# Altium PCB LM25148.PcbDoc
Units mm, origin at the board's own origin, x right, y up, seen from the top; angles counter-clockwise.
Board outline 94.97 x 34.94 mm, 4 copper layers (Top Layer, Layer 1, Layer 2, Bottom Layer), stack 0.568 mm thick; 79 components, 28 nets, 268 pads, 441 vias.
Unrouted connection lines stored in the file: 7.
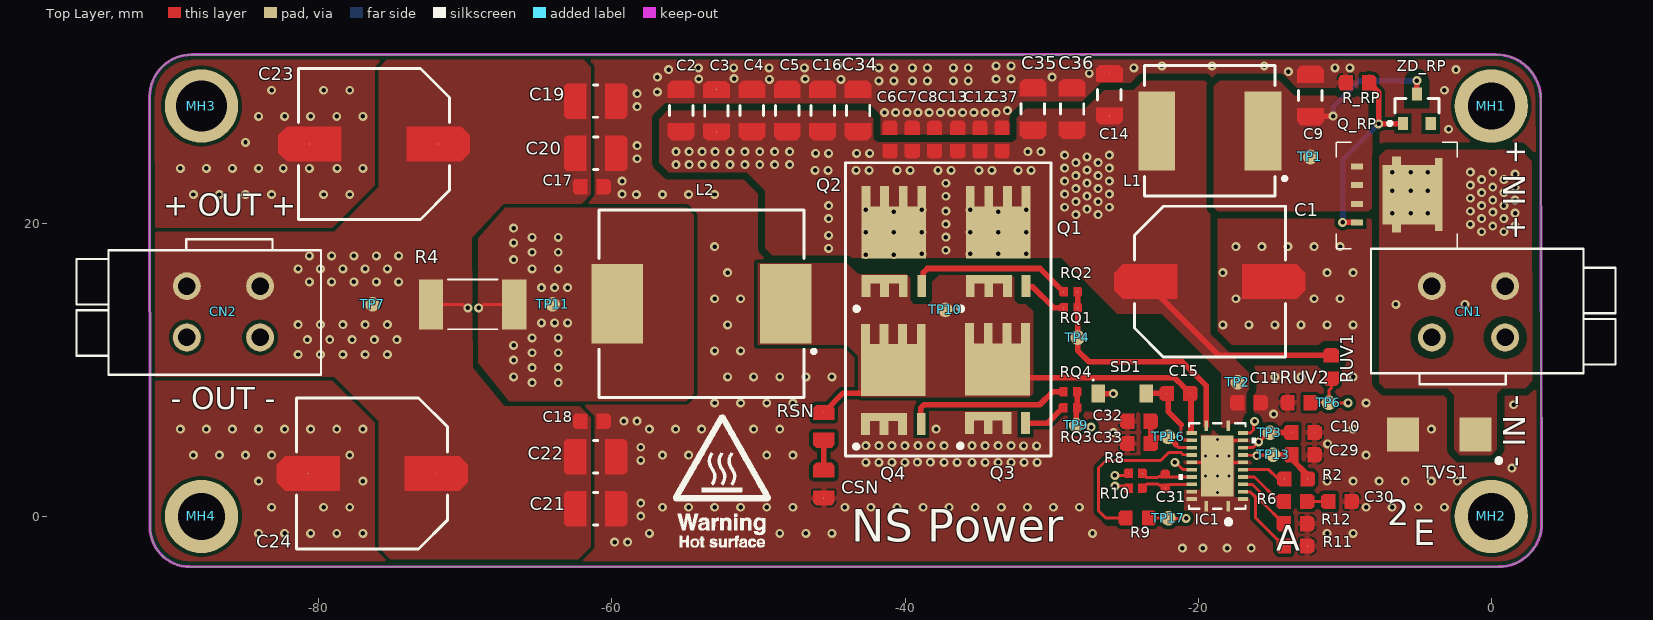
[diagram p0: Top Layer view]
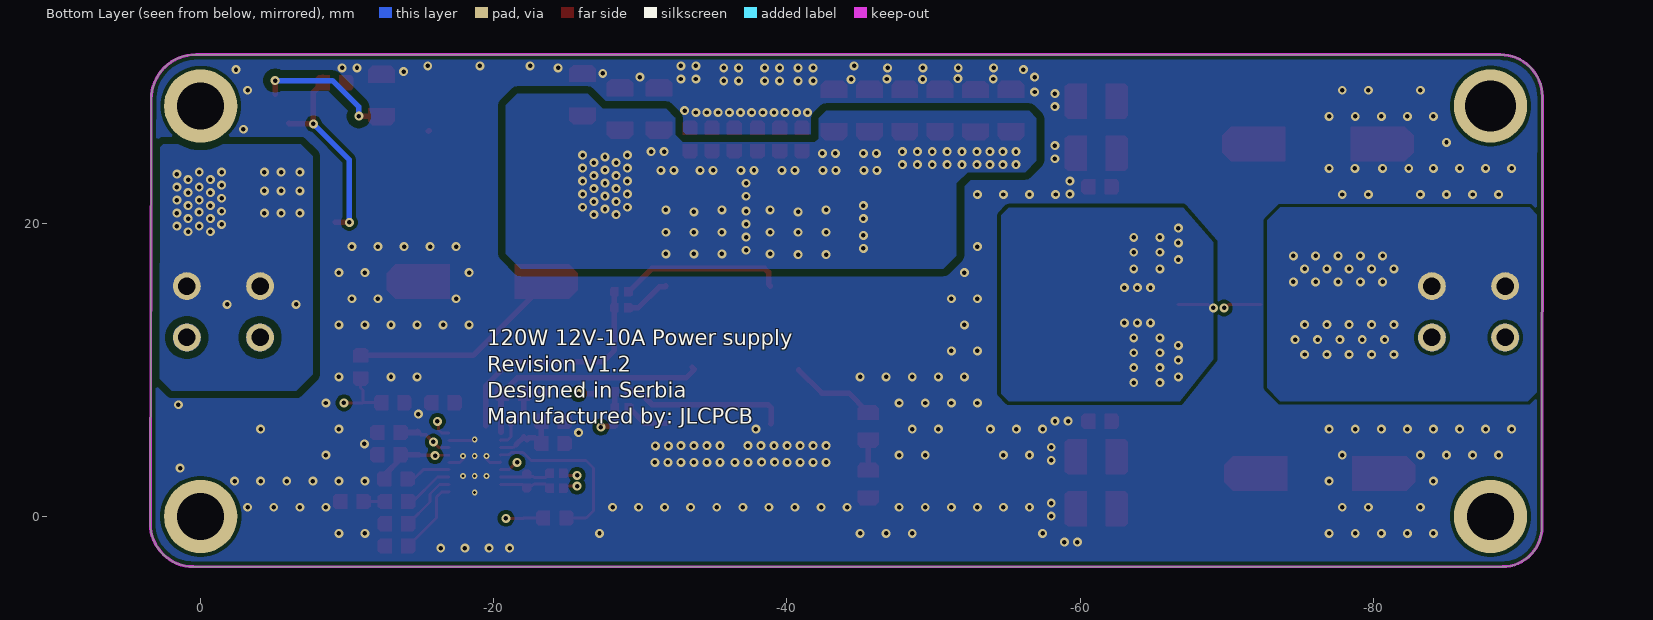
[diagram p1: Bottom Layer view, seen from below]
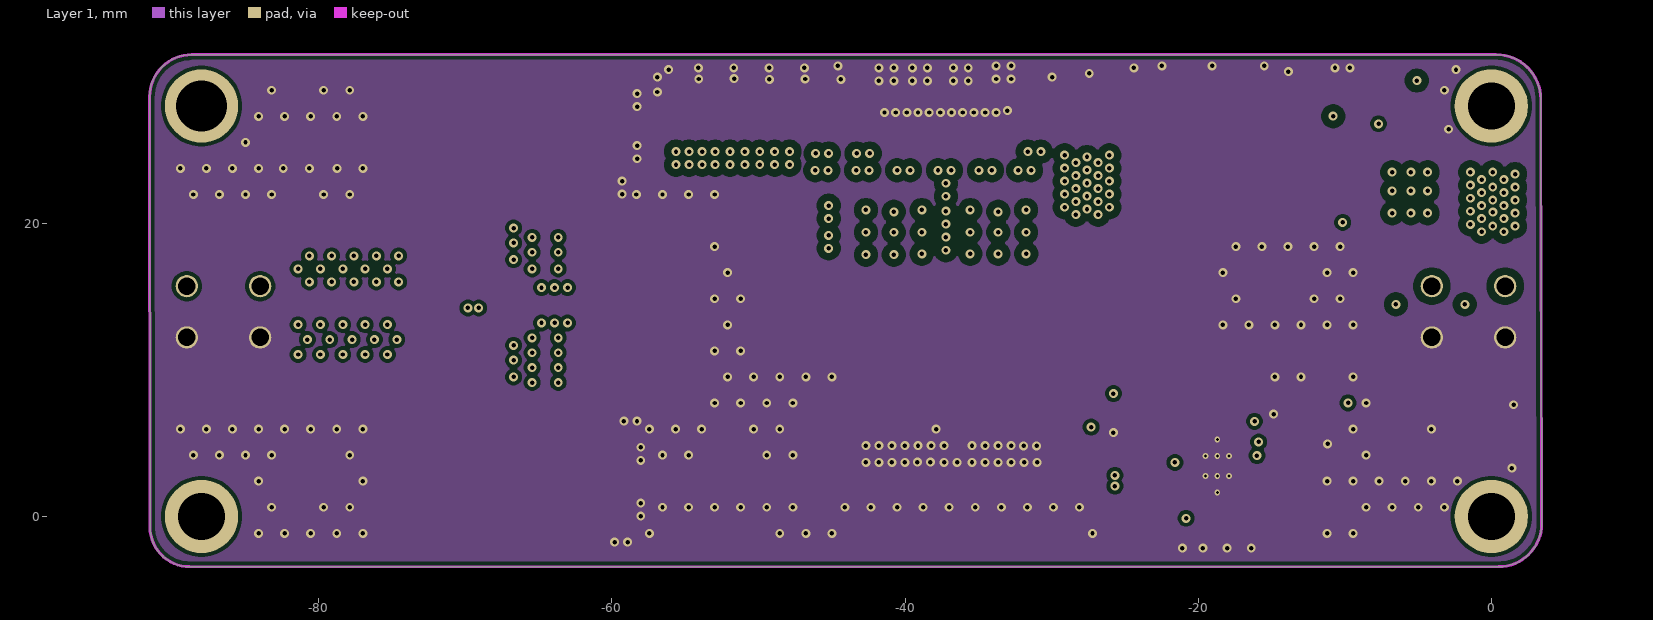
[diagram p2: Layer 1]
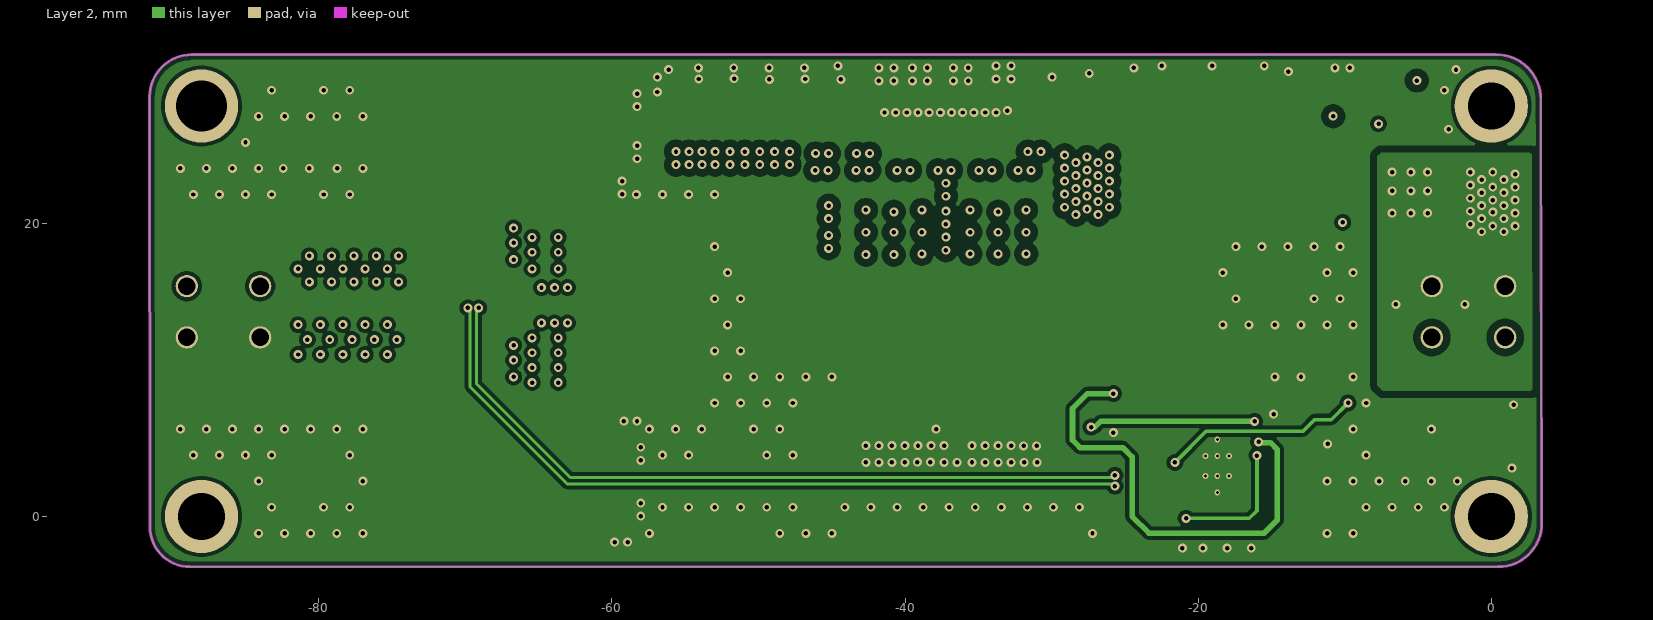
[diagram p3: Layer 2]
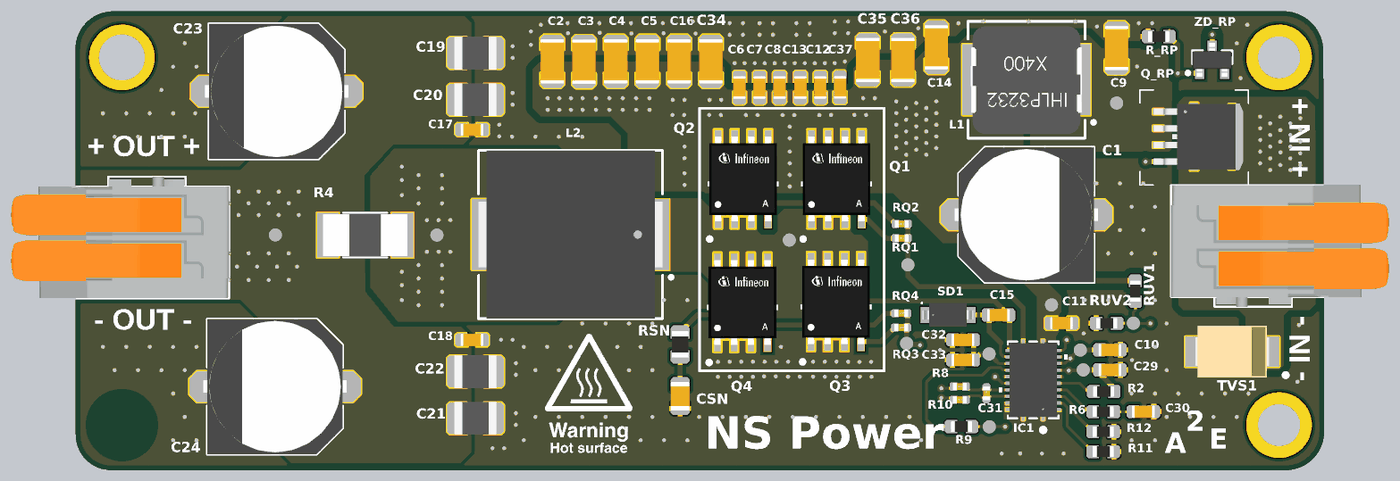
[diagram p4: 3D render of the assembled board from above, using the file's embedded part models]

## Layer stack, top to bottom
Top Solder: solder mask 0.0102, Solder Resist, Dk 3.5
Top Layer: signal copper 0.0356
Dielectric 2: prepreg 0.0711, PP-006, Dk 4.1
Layer 1: signal copper 0.0175
Dielectric 1: dielectric 0.32, FR-4, Dk 4.8
Layer 2: signal copper 0.0175
Dielectric 3: prepreg 0.0711, PP-006, Dk 4.1
Bottom Layer: signal copper 0.0356
Bottom Solder: solder mask 0.0102, Solder Resist, Dk 3.5

## Board outline
-88.806,-3.431 cw(c-88.806,-0.725) -91.512,-0.725 -91.535,28.643 cw(c-88.672,28.643) -88.672,31.506 -88.672,31.507 0.322,31.513 cw(c0.322,28.465) 3.37,28.465 3.431,-0.5 cw(c0.5,-0.5) 0.5,-3.431

## Design rules (kind name [scope] priority, off if disabled: settings)
Clearance "Schematic Clearance Constraint_2" [InNet('NetC9_2')] p1: gap=0.508 ignorepadtopadclearanceinfootprint=FALSE
Clearance "Schematic Clearance Constraint_1" [InNet('VIN')] p2: gap=0.508 ignorepadtopadclearanceinfootprint=FALSE except(0.254: SMDPad-SMDPad)
Clearance "Schematic Clearance Constraint" [InNet('NetCN1_3')] p3: gap=0.508 ignorepadtopadclearanceinfootprint=FALSE
Clearance [All] p4: gap=0.254 ignorepadtopadclearanceinfootprint=FALSE except(0: Arc-Hole Track-Hole SMDPad-Hole THPad-Hole Via-Hole Fill-Hole Poly-Hole Region-Hole Text-Hole; 0.127: Arc-Arc Arc-Track Arc-Via Track-Track Track-Via SMDPad-SMDPad SMDPad-Via Via-Via)
DiffPairsRouting [All] p1: maxlimit=0.254 minlimit=0.254 mostfreqgap=0.254 toplayer_minwidth=0.152 toplayer_maxwidth=0.381 toplayer_prefwidth=0.203 midlayer1_minwidth=0.152 midlayer1_maxwidth=0.381 midlayer1_prefwidth=0.203 midlayer2_minwidth=0.152 midlayer2_maxwidth=0.381 midlayer2_prefwidth=0.203 bottomlayer_minwidth=0.152 bottomlayer_maxwidth=0.381 bottomlayer_prefwidth=0.203 maxuncoupledlength=12.7
HoleSize [All] p1: absolutevalues=TRUE maxlimit=3.81 minlimit=0.025 maxpercent=80.000 minpercent=20.000
MinimumSolderMaskSliver [All] p1: minsoldermaskwidth=0.025
PolygonConnect PolygonConnect_5 [InComponentClass('relief_connect')] p1: connectstyle=Relief reliefconductorwidth=0.381 reliefentries=4 polygonreliefangle="90 Angle" airgapwidth=0.127
PolygonConnect PolygonConnect_4 [InNet('NetCN1_3') vs InNet('NetCN1_3')] p2: connectstyle=Direct reliefconductorwidth=0.254 reliefentries=4 polygonreliefangle="90 Angle" airgapwidth=0.254
PolygonConnect PolygonConnect_1 [All vs IsNamedPolygon('NONET_L01_P000')] p3: thpad.connectstyle=Direct thpad.reliefconductorwidth=0.254 thpad.reliefentries=4 thpad.polygonreliefangle="90 Angle" thpad.airgapwidth=0.254 smdpad.connectstyle=Direct smdpad.reliefconductorwidth=0.254 smdpad.reliefentries=4 smdpad.polygonreliefangle="90 Angle" smdpad.airgapwidth=0.254 via.connectstyle=Relief via.reliefconductorwidth=0.254 via.reliefentries=4 via.polygonreliefangle="90 Angle" via.airgapwidth=0.254
PolygonConnect PolygonConnect_3 [InComponentClass('Dirrect') vs InNetClass('Direct_connect')] p4: connectstyle=Direct reliefconductorwidth=0.254 reliefentries=4 polygonreliefangle="90 Angle" airgapwidth=0.254
PolygonConnect PolygonConnect_2 [InNet('GND')] p5: connectstyle=Direct reliefconductorwidth=0.254 reliefentries=4 polygonreliefangle="90 Angle" airgapwidth=0.254
PolygonConnect [InNetClass('Direct_connect')] p6: connectstyle=Direct reliefconductorwidth=0.254 reliefentries=4 polygonreliefangle="90 Angle" airgapwidth=0.254
RoutingVias [All] p1: holewidth=0.305 width=0.61 viastyle="Through Hole" minholewidth=0.2 minwidth=0.4 maxholewidth=0.305 maxwidth=0.61
SilkToSolderMaskClearance [IsPad] p1: minsilkscreentomaskgap=0.025 clearancetoexposedcopper=TRUE
SolderMaskExpansion [All] p1: expansion=0.102 istentingtop=FALSE
Width [All] p1: maxlimit=0.635 minlimit=0.203 preferedwidth=0.254 toplayer_maxwidth=0.381 midlayer1_minwidth=0.254 midlayer1_maxwidth=0.381 midlayer2_minwidth=0.254 midlayer2_maxwidth=0.381 minimp=50.000000 maximp=50.000000 favimp=50.000000
26 further rules are at their usual default settings.

## Classes and differential pairs
component class relief_connect: C10 C29 C30 C32 C33 CSN R11 R12 R_RP RUV2
component class Dirrect: MH1 MH2 MH4
net class Direct_connect: NetC9_2 R_SENSE_N R_SENSE_P SW_NODE VIN
differential pair R_SENSE: +R_SENSE_P -R_SENSE_N

## Components (designator, comment, footprint, x,y, rotation, side; value= is the part's Value field where it differs from the comment)
C1 "330uF" CAPAE109103X103M -19.205,16.015 r0 top
C2 "10uF" CAP_1206 -55.273,27.699 r270 top
C3 "10uF" CAP_1206 -52.865,27.678 r90 top
C4 "10uF" CAP_1206 -50.447,27.699 r90 top
C5 "10uF" CAP_1206 -48.034,27.699 r90 top
C6 "0.1uF" CAP_0603 -41.029,25.709 r90 top
C7 "0.1uF" CAP_0603 -39.505,25.709 r90 top
C8 "0.1uF" CAP_0603 -37.981,25.709 r270 top
C9 "10uF" CAP_1206 -12.347,28.715 r270 top
C10 "2.2uF" CAP_0603 -12.855,5.728 r180 top
C11 "0.1uF" CAP_0603 -16.538,7.76 r180 top
C12 "0.1uF" CAP_0603 -34.882,25.709 r270 top
C13 "0.1uF" CAP_0603 -36.406,25.709 r90 top
C14 "10uF" CAP_1206 -26.063,28.768 r270 top
C15 "0.1uF" CAP_0603 -21.336,8.382 r180 top
C16 "10uF" CAP_1206 -45.621,27.699 r90 top
C17 "100nf" CAP_0603 -61.366,22.492 r180 top
C18 "100nf" CAP_0603 -61.369,6.49 r180 top
C19 "22uF" CAP_1210 -61.115,28.334 r0 top
C20 "22uF" CAP_1210 -61.112,24.778 r0 top
C21 "22uF" CAP_1210 -61.115,0.521 r180 top
C22 "22uF" CAP_1210 -61.115,4.077 r0 top
C23 "220uF" CAPAE109103X103M -76.228,25.413 r180 top
C24 "220uF" CAPAE109103X103M -76.355,2.934 r180 top
C29 "100nf" CAP_0603 -12.855,4.204 r180 top
C30 "1.8nF" CAP_0603 -10.315,1.029 r180 top
C31 "6pF" CAP_0402 -22.253,2.426 r90 top
C32 "100nf" CAP_0603 -24.031,6.49 r0 top
C33 "2.2uF" CAP_0603 -24.031,4.966 r180 top
C34 "10uF" CAP_1206 -43.208,27.699 r90 top
C35 "10uF" CAP_1206 -31.275,27.805 r90 top
C36 "10uF" CAP_1206 -28.608,27.805 r90 top
C37 "0.1uF" CAP_0603 -33.384,25.722 r270 top
CN1 "TERM BLK PCB LEVER 3.5MM 2POS" CONN2_2601-1102_WAG -1.557,13.962 r90 top locked
CN2 "TERM BLK PCB LEVER 3.5MM 2POS" CONN2_2601-1102_WAG -86.5,13.962 r270 top locked
CSN "1nF" CAP_0805 -45.542,2.21 r90 top
IC1 "LM25148RGYR 42-V SYNCHRONOUS BUCK DC/DC CONT" VQFN25_RGY_TEX -18.697,3.442 r180 top
L1 "2.2uH" IHLP-3232DZ-51 -19.205,26.302 r180 top
L2 "10uH" INDP135126X65N -53.881,14.508 r180 top locked
MH1 "Mounting Hole" HOLE-3mm#1 0.322,28.465 r0 top
MH2 "Mounting Hole" HOLE-3mm#2 -0.008,-0.754 r0 top
MH3 "Mounting Hole" HOLE-3mm#3 -92.561,27.893 r0 top
MH4 "Mounting Hole" HOLE-3mm#4 -106.822,-0.598 r0 top
Q1 "IAUCN04S7L028ATMA1" PG-TDSON-8-33 -33.649,18.739 r0 top locked
Q2 "IAUCN04S7L028ATMA1" PG-TDSON-8-33 -40.761,18.739 r0 top locked
Q3 "IAUCN04S7L028ATMA1" PG-TDSON-8-33 -33.688,9.39 r0 top locked
Q4 "IAUCN04S7L028ATMA1" PG-TDSON-8-33 -40.8,9.343 r0 top locked
Q_RP "SQJ659EP PMOS" "PowerPAK SO-8L SINGLE" -6.383,21.963 r270 top
R2 "49.9kOhm" RES_0603 -13.325,2.553 r180 top
R4 "5mOhm" SENSE_RES_2512 -69.502,14.47 r180 top
R6 "24.9kOhm" RES_0603 -13.363,1.029 r180 top
R8 "0 Ohm Jump" RES_0402 -24.285,2.934 r180 top locked
R9 "100Kohm" RES_0603 -24.158,-0.114 r0 top
R10 "0 Ohm Jump" RES_0402 -24.285,1.918 r180 top
R11 "41.2kOhm" RES_0603 -13.363,-2.019 r180 top
R12 "49.3kOhm" RES_0603 -13.363,-0.495 r180 top
R_RP "47kOhm" RES_0603 -9.144,29.591 r0 top
RQ1 "0 Ohm Jump" RES_0402 -28.702,14.224 r180 top
RQ2 "0 Ohm Jump" RES_0402 -28.702,15.316 r180 top
RQ3 "0 Ohm Jump" RES_0402 -28.734,7.424 r180 top
RQ4 "0 Ohm Jump" RES_0402 -28.731,8.516 r180 top
RSN "3 Ohm" RES_0805 -45.542,6.147 r90 top
RUV1 "200kOhm" RES_0603 -10.922,10.198 r90 top
RUV2 "14.3kOhm" RES_0603 -13.109,7.76 r0 top
SD1 "BAT54T1G Schottky" SODFL371X135-2N -25.174,8.395 r0 top
TP1 "Test point" TestPoint -12.347,24.524 r0 top
TP2 "Test point" TestPoint -17.3,9.157 r90 top
TP3 "Test point" TestPoint -15.113,5.715 r0 top
TP4 "Test point" TestPoint -28.222,12.205 r90 top
TP6 "Test point" TestPoint -11.077,7.76 r90 top
TP7 "Test point" TestPoint -76.327,14.478 r90 top
TP9 "Test point" TestPoint -28.321,6.223 r90 top
TP10 "Test point" TestPoint -37.244,14.089 r90 top
TP11 "Test point" TestPoint -64.041,14.47 r90 top
TP13 "Test point" TestPoint -14.887,4.204 r0 top
TP16 "Test point" TestPoint -22.05,5.423 r0 top
TP17 "Test point" TestPoint -22.033,-0.122 r90 top
TVS1 "TPSMB33CA" DO-214AA -3.556,5.588 r180 top
ZD_RP "DZ23C15-E3-08 Zener Diode" SOT95P245X96-3N -5.08,27.813 r90 top

## Footprints (in the part's own frame and the unit in brackets; to place one, negate y for a bottom-side part, rotate by r counter-clockwise, add the part's x,y. Pads: shape width x height; smd on the part's side, far side on the other; paste and mask are expansions set on the pad)
CAP_0402 [mil] "Chip Capacitor, 2-Leads, Body 0.40x0.20mm, IPC Medium Density"
  round 1 smd mask+1.97: 1(-18.9,0) 2(18.9,0)
  Top Layer region: 7.68,-12.2 24.51,-12.2 30.12,-6.59 30.12,6.59 24.51,12.2 7.68,12.2
  Top Layer region: -24.51,-12.2 -30.12,-6.59 -30.12,6.59 -24.51,12.2 -7.68,12.2 -7.68,-12.2
  body extent -21,-11 20,11, height 22
CAP_0603 [mil] "Chip Capacitor, 2-Leads, Body 1.60x0.80mm, IPC Medium Density"
  round 1 smd: 1(-31.5,0) 2(31.5,0)
  Top Layer region: -50.2,-13.8 -50.2,13.8 -44.31,19.69 -12.8,19.69 -12.8,-19.69 -44.31,-19.69
  Top Layer region: 12.8,-19.69 12.8,19.69 44.31,19.69 50.2,13.8 50.2,-13.8 44.31,-19.69
  body extent -34,-19 34,19, height 31
CAP_0805 [mil] "Chip Capacitor, 2-Leads, Body 2.00x1.25mm, IPC Medium Density"
  round 1 smd: 1(-37.4,0) 2(37.4,0)
  Top Layer region: 17.72,-28.54 17.72,28.54 49.46,28.54 57.09,20.91 57.09,-20.91 49.46,-28.54
  Top Layer region: -57.09,-20.91 -57.09,20.91 -49.46,28.54 -17.72,28.54 -17.72,-28.54 -49.46,-28.54
  body extent -43,-29 43,29, height 24
CAP_1206 [mil] "Chip Capacitor, 2-Leads, Body 3.20x1.60mm, IPC Medium Density"
  round 1 smd: 1(-57.09,0) 2(57.09,0)
  Top Layer region: -79.72,-25.28 -79.72,25.28 -69.57,35.43 -34.45,35.43 -34.45,-35.43 -69.57,-35.43
  Top Layer region: 34.45,-35.43 34.45,35.43 69.57,35.43 79.72,25.28 79.72,-25.28 69.57,-35.43
  silkscreen extent -14,-31 14,31, body extent -67,-35 67,35, height 35
CAP_1210 [mil] "Chip Capacitor, 2-Leads, Body 3.20x2.50mm, IPC Medium Density"
  round 1 smd: 1(-55.12,0) 2(55.12,0)
  Top Layer region: 25.59,-47.24 77.26,-47.24 84.65,-39.86 84.65,39.86 77.26,47.24 25.59,47.24
  Top Layer region: -84.65,-39.86 -77.26,-47.24 -25.59,-47.24 -25.59,47.24 -77.26,47.24 -84.65,39.86
  silkscreen extent -6,-43 6,43, body extent -63,-49 63,49, height 110
CAPAE109103X103M [mil] "Aluminum Electrolytic Capacitor, Body 10.30x10.30x10.30mm, IPC Low Density"
  round 1 smd: 1(-172.24,0) 2(172.24,0)
  Top Layer region: -256.89,-23.13 -233.76,-46.26 -87.6,-46.26 -87.6,46.26 -233.76,46.26 -256.89,23.13
  Top Layer region: 87.6,-46.26 233.76,-46.26 256.89,-23.13 256.89,23.13 233.76,46.26 87.6,46.26
  silkscreen extent -203,-203 203,203, body extent -215,-203 215,203, height 406
CONN2_2601-1102_WAG [mm]
  round 1.9 / inner round 1.524 / far side round 1.9 hole 1.2 paste-0.95 mask+0: 1(-1.75,2.5) 2(-1.75,-2.5) 3(1.75,2.5) 4(1.75,-2.5)
  silkscreen extent -4.95,-10.02 4.3,6.65, body extent -4.95,-9.92 4.3,6.66, height 12.75
DO-214AA [mm]
  rect 2.2x2.3 smd: 1(-2.47,0) 2(2.47,0)
  silkscreen extent -4.22,1.63 -3.91,1.93, body extent -2.79,-1.97 2.79,1.97, height 2.49
HOLE-3mm#1 [mm]
  round 5 hole 3.2 mask+0.102: 1(-0.322,-0.465)
HOLE-3mm#2 [mm]
  round 5 hole 3.2 mask+0.102: 1(0.008,0.754)
HOLE-3mm#3 [mm]
  round 5 hole 3.5: 1(4.561,0.107)
HOLE-3mm#4 [mm]
  round 5 hole 3.2 mask+0.102: 1(18.822,0.598)
IHLP-3232DZ-51 [mm] "Precision Wire Wound Inductor, 2-Leads, Body 8.64x8.81mm, IPC Medium Density"
  rect 2.5x5.4 smd: 1(-3.625,0) 2(3.625,0)
  silkscreen extent -5.23,-4.45 4.45,4.45, body extent -4.23,-4.06 4.23,4.14, height 4
INDP135126X65N [mm] "Precision Wire Wound Inductor, 2-Leads, Body 13.50x12.60mm, IPC Medium Density"
  rect 3.5x5.4 smd: 1(-5.75,0) 2(5.75,0)
  silkscreen extent -7.78,-6.4 7,6.4, body extent -7,-6.4 7,6.4, height 6.51
PG-TDSON-8-33 [mm] "5.48x5.15"
  rect 0.5x0.75 on Top Paste: 1(-1.905,-3.345) 1(-0.635,-3.345) 1(0.635,-3.345)
  rect 0.5x1.2 on Top Paste: 1(-1.905,3.12) 1(-0.635,3.12) 1(0.635,3.12) 1(1.905,-3.12) 1(1.905,3.12)
  rect 0.85x0.45 on Top Paste: 1(-1.73,-2.545) 1(-0.635,-2.545) 1(0.46,-2.545)
  rect 1.5x1.5 on Top Paste: 1(-0.85,-0.205) 1(-0.85,1.495) 1(0.85,-0.205) 1(0.85,1.495)
  rect 0.6x1.4 smd paste-1: D(-1.905,3.095) D(-0.635,3.095) D(0.635,3.095) D(1.905,3.095)
  rect 4.41x3.545 smd paste-2539.97: D(0,0.647)
  rect 0.6x1.5 smd paste-1: G(1.905,-3.02) S(-1.905,-3.02) S(-0.635,-3.02) S(0.635,-3.02)
  rect 2.805x0.565 smd paste-1: S(-0.762,-2.552)
  silkscreen extent -2.58,-4.61 -2.5,-4.54, body extent -2.71,-3.22 2.71,3.22, height 1.01
"PowerPAK SO-8L SINGLE" [mm]
  rrect0% 0.595x0.61 smd: D(-2.286,-0.076) D(2.286,-0.076)
  rrect10% 5x0.51 smd: D(0,2.794)
  rrect0% 4.061x3.63 smd: D(0,0.762)
  rrect0% 0.41x0.82 smd: G(1.905,-2.791) S(-1.905,-2.791) S(-0.635,-2.791) S(0.635,-2.794)
  silkscreen extent -3.56,-4.19 3.68,4.06, body extent -2.54,-3.15 2.54,3.66, height 1.2
RES_0402 [mil]
  round 1 smd mask+1.97: 1(-18.9,0) 2(18.9,0)
  Top Layer region: -26.75,-12.2 -30.12,-8.84 -30.12,8.84 -26.75,12.2 -7.68,12.2 -7.68,-12.2
  Top Layer region: 7.68,-12.2 26.75,-12.2 30.12,-8.84 30.12,8.84 26.75,12.2 7.68,12.2
  body extent -21,-11 20,11, height 22
RES_0603 [mil] "Chip Resistor, 2-Leads, Body 1.60x0.80mm, IPC Medium Density"
  round 1 smd: 1(-31.5,0) 2(31.5,0)
  Top Layer region: 12.8,-19.69 12.8,19.69 44.31,19.69 50.2,13.8 50.2,-13.8 44.31,-19.69
  Top Layer region: -50.2,-13.8 -50.2,13.8 -44.31,19.69 -12.8,19.69 -12.8,-19.69 -44.31,-19.69
  body extent -31,-16 31,16, height 18
RES_0805 [mil]
  round 1 smd: 1(-37.4,0) 2(37.4,0)
  Top Layer region: 17.72,-28.54 49.21,-28.54 57.09,-20.67 57.09,20.67 49.21,28.54 17.72,28.54
  Top Layer region: -49.21,-28.54 -57.09,-20.67 -57.09,20.67 -49.21,28.54 -17.72,28.54 -17.72,-28.54
  body extent -39,-25 39,25, height 24
SENSE_RES_2512 [mm]
  rect 1.65x3.42 smd: 1(-2.835,0) 2(2.835,0)
  silkscreen extent -1.69,-1.7 1.69,1.7, body extent -3.2,-1.6 3.2,1.6, height 0.8
SODFL371X135-2N [mm] "SODFL, 2-Leads, Body 1.60x3.71mm, IPC Medium Density"
  rect 0.91x1.22 smd: 1(-1.635,0) 2(1.635,0)
  silkscreen extent -2.04,0.86 -1.94,0.96, body extent -1.93,-0.9 1.93,0.9, height 1.35
SOT95P245X96-3N [mm] "SOT23, 3-Leads, Body 2.90x2.45mm, Pitch 0.95mm, IPC Medium Density"
  rect 0.9x0.7 smd: 1(-1,0.95) 2(-1,-0.95) 3(1,0)
  silkscreen extent -1.12,-1.5 0.7,1.97, body extent -1.3,-1.5 1.3,1.5, height 0.96
TestPoint [mm] "1mm"
  round 1 smd mask+0: 1(0,0)
VQFN25_RGY_TEX [mil]
  rect 10x28 smd paste+0 mask+2.76: 1(-29.53,108) 12(-29.53,-108) 13(29.53,-108) 24(29.53,108)
  rect 28x10 smd paste+0 mask+2.76: 2(-69,88.61) 3(-69,68.91) 4(-69,49.22) 5(-69,29.53) 6(-69,9.84) 7(-69,-9.85) 8(-69,-29.54) 9(-69,-49.23) 10(-69,-68.91) 11(-69,-88.61) 14(69,-88.61) 15(69,-68.91) 16(69,-49.23) 17(69,-29.54) 18(69,-9.85) 19(69,9.84) 20(69,29.53) 21(69,49.22) 22(69,68.91) 23(69,88.61)
  rect 87x165 smd paste-82 mask+2.76: 25(0,0)
  silkscreen extent -103,-115 103,153, body extent -71,-110 71,110, height 39

## Part data
C1: library part C000026, "330 µF 50 V Aluminum Electrolytic Capacitors Radial, Can - SMD 120mOhm @ 100kHz 2000 Hrs @ 105°C", Digikey Part Number=565-EMZR500ARA331MJA0GCT-ND, Manufacturer Product Number=EMZR500ARA331MJA0G, capacitance=330uF, ComponentLink1Description=DigiKey, ComponentLink1URL=https://www.digikey.com/en/products/detail/chemi-con/EMZR500ARA331MJA0G/5824768
C2 C3 C4 C5 C9 C14 C16 C34 C35 C36: library part C000017, "10 µF ±10% 50V Ceramic Capacitor X7R 1206 (3216 Metric)", Digikey Part Number=1276-6767-1-ND, Manufacturer Product Number=CL31B106KBHNNNE, capacitance=10uF, ComponentLink1Description=DigiKey, ComponentLink1URL=https://www.digikey.com/en/products/detail/samsung-electro-mechanics/CL31B106KBHNNNE/5961251
C6 C7 C8 C11 C12 C13 C15 C37: library part C000018, "0.1 µF ±10% 50V Ceramic Capacitor X7R 0603 (1608 Metric)", Digikey Part Number=1276-1000-1-ND, Manufacturer Product Number=CL10B104KB8NNNC, capacitance=0.1uF, ComponentLink1Description=DigiKey, ComponentLink1URL=https://www.digikey.com/en/products/detail/samsung-electro-mechanics/CL10B104KB8NNNC/3886658
C10 C33: library part C000014, "8 pF ±0.05pF 25V Ceramic Capacitor C0G, NP0 01005 (0402 Metric)", Digikey Part Number=490-12731-1-ND, Manufacturer Product Number=GRM188C71C225KE11D, capacitance=2.2uF, ComponentLink1Description=DigiKey, ComponentLink1URL=https://www.digikey.com/en/products/detail/murata-electronics/GRM188C71C225KE11D/4905311
C17 C18 C29 C32: library part C000007, "0.1 µF ±10% 25V Ceramic Capacitor X7R 0603 (1608 Metric)", capacitance=100nF, Digikey Part Number=478-KAM15AR71E104KTCT-ND, Manufacturer Product Number=KAM15AR71E104KT, ComponentLink1Description=DigiKey, ComponentLink1URL=https://www.digikey.com/en/products/detail/kyocera-avx/06033C104K4T2A/8019250
C19 C20 C21 C22: library part C000032, "22 µF ±10% 25V Ceramic Capacitor X7R 1210 (3225 Metric)", Digikey Part Number=1276-3392-1-ND, Manufacturer Product Number=CL32B226KAJNNNE, capacitance=22uF, ComponentLink1Description=DigiKey, ComponentLink1URL=https://www.digikey.com/en/products/detail/samsung-electro-mechanics/CL32B226KAJNNNE/3889050
C23 C24: library part C000033, "220 µF 35 V Aluminum - Polymer Capacitors Radial, Can - SMD 23mOhm 1000 Hrs @ 150°C", Digikey Part Number=399-A785MN227M1VLAS023CT-ND, Manufacturer Product Number=A785MN227M1VLAS023, capacitance=220uF, ComponentLink1Description=DigiKey, ComponentLink1URL=https://www.digikey.com/en/products/detail/kemet/A785MN227M1VLAS023/22003773?s=N4IgTCBcDaIIIHYAcBWAsgOTGBaCMAagDJwDKADGAMwgC6AvkA
C30: library part C000027, "1800 pF ±10% 25V Ceramic Capacitor X7R 0603 (1608 Metric)", Digikey Part Number=399-15370-1-ND, Manufacturer Product Number=C0603C182K3RACTU, capacitance=1.8nF, ComponentLink1Description=DigiKey, ComponentLink1URL=https://www.digikey.com/en/products/detail/kemet/C0603C182K3RAC7867/2200107
C31: library part C000016, "6 pF ±0.5pF 25V Ceramic Capacitor C0G, NP0 0402 (1005 Metric)", Digikey Part Number=399-CBR04C609D3GACCT-ND, Manufacturer Product Number=CBR04C609D3GAC, capacitance=6pF, ComponentLink1Description=DigiKey, ComponentLink1URL=https://www.digikey.com/en/products/detail/kemet/CBR04C609D3GAC/18137865?s=N4IgjCBcpgLFoDGUBmBDANgZwKYBoQB7KAbXAFYBOAJlgHYQBdAgBwBcoQBlNgJwEsAdgHMQAXwJgAbAhDJI6bPiKkQAZkphyADiasOkbnyGiJIagAZYlWfMW4CxSGSkACFgDE9IdpwCqgvxsAPIoALI4aFgArrw44gQAtNS2UHzRyk5k5ExieUA
CN1 CN2: library part 00000017, "2 Position Wire to Board Terminal Block Horizontal with Board 0.138\" (3.50mm) Through Hole", Digikey Part Number=2946-2601-1102-ND, Manufacturer Product Number=2601-1102, ComponentLink1Description=Digikey, ComponentLink1URL=https://www.digikey.com/en/products/detail/wago-corporation/2601-1102/17122694
CSN: library part C000035, "1000 pF ±10% 100V Ceramic Capacitor X7R 0805 (2012 Metric)", Digikey Part Number=311-1472-1-ND, Manufacturer Product Number=CC0805KRX7R0BB102, capacitance=1nF, ComponentLink1Description=DigiKey, ComponentLink1URL=https://www.digikey.com/en/products/detail/yageo/CC0805KRX7R0BB102/2833637
IC1: library part LM25148RGYR, "Buck Regulator Positive Output Step-Down DC-DC Controller IC 24-VQFN (5.5x3.5)", Digikey Part Number=296-LM25148RGYRCT-ND, MOUSER Part Number=595-LM25148RGYR, ComponentLink1Description=DigiKey, ComponentLink1URL=https://www.digikey.com/en/products/detail/texas-instruments/LM25148RGYR/15857124, ComponentLink2Description=Mouser, ComponentLink2URL=https://eu.mouser.com/ProductDetail/Texas-Instruments/LM25148RGYR?qs=doiCPypUmgEViljGB5jAZw%3D%3D, Manufacturer Product Number=LM25148RGYR
L1: library part L000015, "FIXED IND 2.2UH 11.5A 12.5 MOHM", case=3232, Digikey Part Number=541-IHLP3232DZER2R2M5ACT-ND, Manufacturer Product Number=IHLP3232DZER2R2M5A, MOUSER Part Number=70-IHLP3232DZR2R2M5A, ComponentLink1Description=DigiKey, ComponentLink1URL=https://www.digikey.com/en/products/detail/vishay-dale/IHLP3232DZER2R2M5A/4070222, ComponentLink2Description=Mouser, ComponentLink2URL=https://eu.mouser.com/ProductDetail/Vishay-Dale/IHLP3232DZER2R2M5A?qs=tDDpbAIEejr3%252BeiaEh99%252Bg%3D%3D, inductance=2.2uH
L2: library part L000016, "FIXED IND 10UH 11A 15.8 MOHM SMD", case=13.5x12.6, Digikey Part Number=553-4029-1-ND, Manufacturer Product Number=PA4343.103ANLT, MOUSER Part Number=673-PA4343.103ANLT, ComponentLink1Description=DigiKey, ComponentLink1URL=https://www.digikey.com/en/products/detail/pulse-electronics/PA4343-103ANLT/7943151?s=N4IgTCBcDaIAoEEAsBmVA6AjABhQgcgDIAqIAugL5A, ComponentLink2Description=Mouser, ComponentLink2URL=https://eu.mouser.com/ProductDetail/Pulse-Electronics/PA4343.103ANLT?qs=chTDxNqvsym%252BWuIQdh7qfw%3D%3D, inductance=10uH
MH1 MH2 MH3 MH4: library part 00000006, "Mounting Hole 3mm"
Q1 Q2 Q3 Q4: library part 00000014, "N-Channel 40 V 100A Surface Mount PG-TDSON-8-33", Digikey Part Number=448-IAUCN04S7L028ATMA1CT-ND, MOUSER Part Number=726-IAUCN04S7L028ATM, ComponentLink1Description=DigiKey, ComponentLink1URL=https://www.digikey.com/en/products/detail/infineon-technologies/IAUCN04S7L028ATMA1/22157720?s=N4IgTCBcDaIJIEECqBhAcgBgCwGUDsAMhmABwgC6AvkA, ComponentLink2Description=Mouser, ComponentLink2URL=https://eu.mouser.com/ProductDetail/Infineon-Technologies/IAUCN04S7L028ATMA1?qs=mELouGlnn3deeHozE86VbA%3D%3D, ComponentLink3Description="Footprint Drawing", ComponentLink3URL=https://www.infineon.com/cms/en/product/packages/PG-TDSON/PG-TDSON-8-33/, Manufacturer Product Number=IAUCN04S7L028ATMA1
Q_RP: library part 00000005, "P-Channel 60 V 52A (Tc) 83W (Tc) Surface Mount PowerPAK® SO-8", Digikey Part Number=SQJ459EP-T1_GE3CT-ND, Manufacturer Product Number=SQJ459EP-T1_GE3, MOUSER Part Number=78-SQJ459EP-T2_BE3, ComponentLink1Description=DigiKey, ComponentLink1URL=https://www.digikey.com/en/products/detail/vishay-siliconix/SQJ459EP-T1-GE3/6708881, ComponentLink2Description=Mouser, ComponentLink2URL=https://eu.mouser.com/ProductDetail/Vishay-Siliconix/SQJ459EP-T2_BE3?qs=CiayqK2gdcKpg8h0vLRPjA%3D%3D
R2: library part R000025, "49.9 kOhms ±1% 0.1W, 1/10W Chip Resistor 0603 (1608 Metric) Moisture Resistant Thick Film", Digikey Part Number=541-49.9KHCT-ND, Manufacturer Product Number=CRCW060349K9FKEA, ComponentLink1Description=DigiKey, ComponentLink1URL=https://www.digikey.com/en/products/detail/vishay-dale/CRCW060349K9FKEA/1180003, resistance=49.9kOhm
R4: library part R000033, "5 mOhms ±1% 2W Chip Resistor 2512 (6332 Metric) Automotive AEC-Q200, Current Sense, Moisture Resistant Metal Element", Digikey Part Number=CRF2512-FZ-R005ELFCT-ND, Manufacturer Product Number=CRF2512-FZ-R005ELF, ComponentLink1Description=DigiKey, ComponentLink1URL=https://www.digikey.com/en/products/detail/bourns-inc/CRF2512-FZ-R005ELF/6210986, resistance=5mOhm
R6: library part R000017, "24.9 kOhms ±1% 0.1W, 1/10W Chip Resistor 0603 (1608 Metric) Automotive AEC-Q200 Thick Film", Digikey Part Number=P24.9KHCT-ND, Manufacturer Product Number=ERJ-3EKF2492V, ComponentLink1Description=DigiKey, ComponentLink1URL=https://www.digikey.com/en/products/detail/panasonic-electronic-components/ERJ-3EKF2492V/196236, resistance=24.9kOhm
R8 R10 RQ1 RQ2 RQ3 RQ4: library part R000008, "0 Ohms Jumper Chip Resistor 0402 (1005 Metric) Automotive AEC-Q200 Thick Film", Digikey Part Number=P0.0JCT-ND, Manufacturer Product Number=ERJ-2GE0R00X, ComponentLink1Description=DigiKey, ComponentLink1URL=https://www.digikey.com/en/products/detail/panasonic-electronic-components/ERJ-2GE0R00X/146727, resistance="0 Ohm Jump"
R9: library part R000006, "100 kOhms ±1% 0.1W, 1/10W Chip Resistor 0603 (1608 Metric) Automotive AEC-Q200 Thick Film", Digikey Part Number=RMCF0603FG100KCT-ND, Manufacturer Product Number=RMCF0603FG100K, resistance=100kOhm, ComponentLink1Description=DigiKey, ComponentLink1URL=https://www.digikey.com/en/products/detail/stackpole-electronics-inc/RMCF0603FG100K/1713543
R11: library part R000015, "41.2 kOhms ±1% 0.1W, 1/10W Chip Resistor 0603 (1608 Metric) Automotive AEC-Q200 Thick Film", Digikey Part Number=P41.2KHCT-ND, Manufacturer Product Number=ERJ-3EKF4122V, ComponentLink1Description=DigiKey, ComponentLink1URL=https://www.digikey.com/en/products/detail/panasonic-electronic-components/ERJ-3EKF4122V/196347, resistance=41.2kOhm
R12: library part R000023, "49.3 kOhms ±0.1% 0.1W, 1/10W Chip Resistor 0603 (1608 Metric) Thin Film", Digikey Part Number=13-RT0603BRD0749K3LCT-ND, Manufacturer Product Number=RT0603BRD0749K3L, ComponentLink1Description=DigiKey, ComponentLink1URL=https://www.digikey.com/en/products/detail/yageo/RT0603BRD0749K3L/5927964, resistance=49.3kOhm
R_RP: library part R000010, "47 kOhms ±1% 0.1W, 1/10W Chip Resistor 0603 (1608 Metric) Moisture Resistant Thick Film", Digikey Part Number=311-47.0KHRCT-ND, Manufacturer Product Number=RC0603FR-0747KL, ComponentLink1Description=DigiKey, ComponentLink1URL=https://www.digikey.com/en/products/detail/yageo/RC0603FR-0747KL/727253, resistance=47kOhm
RSN: library part R000034, "3 Ohms ±1% 0.125W, 1/8W Chip Resistor 0805 (2012 Metric) Moisture Resistant Thick Film", Digikey Part Number=311-3.00CRCT-ND, Manufacturer Product Number=RC0805FR-073RL, ComponentLink1Description=DigiKey, ComponentLink1URL=https://www.digikey.com/en/products/detail/yageo/RC0805FR-073RL/727799, resistance="3 Ohm"
RUV1: library part R000031, "200 kOhms ±1% 0.1W, 1/10W Chip Resistor 0603 (1608 Metric) Moisture Resistant Thick Film", Digikey Part Number=311-200KHRCT-ND, Manufacturer Product Number=RC0603FR-07200KL, ComponentLink1Description=DigiKey, ComponentLink1URL=https://www.digikey.com/en/products/detail/yageo/RC0603FR-07200KL/727044, resistance=200kOhm
RUV2: library part R000032, "14.3 kOhms ±1% 0.1W, 1/10W Chip Resistor 0603 (1608 Metric) Automotive AEC-Q200 Thick Film", Digikey Part Number=RMCF0603FT14K3CT-ND, Manufacturer Product Number=RMCF0603FT14K3, ComponentLink1Description=DigiKey, ComponentLink1URL=https://www.digikey.com/en/products/detail/stackpole-electronics-inc/RMCF0603FT14K3/1761296, resistance=14.3kOhm
SD1: library part 00000009, "Diode 30 V 200mA Surface Mount SOD-123", Digikey Part Number=BAT54T1GOSCT-ND, Manufacturer Product Number=BAT54T1G, ComponentLink1Description=DigiKey, ComponentLink1URL=https://www.digikey.com/en/products/detail/onsemi/BAT54T1G/918319
TP1 TP2 TP3 TP4 TP6 TP7 TP9 TP10 TP11 TP13 TP16 TP17: library part TP002, "Test point 1mm"
TVS1: library part 00000015, "45.7V Clamp 13.3A Ipp Tvs Diode Surface Mount DO-214AA (SMBJ)", Digikey Part Number=F6323CT-ND, ComponentLink1Description=DigiKey, ComponentLink1URL=https://www.digikey.com/en/products/detail/littelfuse-inc/TPSMB33CA/4835275, Manufacturer Product Number=TPSMB33CA
ZD_RP: library part 00000006, "Zener Diode Array 1 Pair Common Cathode 15 V 300 mW ±5% SOT-23-3", Digikey Part Number=112-DZ23C15-E3-08CT-ND, Manufacturer Product Number=DZ23C15-E3-08, ComponentLink1Description=DigiKey, ComponentLink1URL=https://www.digikey.com/en/products/detail/vishay-general-semiconductor-diodes-division/DZ23C15-E3-08/4831460

## Via types
v1: diameter 0.61, hole 0.305, Top Layer to Bottom Layer, tented both sides, 433 vias
v2: diameter 0.4, hole 0.2, Top Layer to Bottom Layer, tented both sides, 8 vias

## Nets (pads, with @x,y where several pads share a name; then routed paths per layer and width w, separated by ;. In a path a pad name is that pad's centre, name@x,y a point inside that pad or via, vN(x,y) a via of type N, cw(c..) or ccw(c..) an arc to the next point about the centre after c; other vN are vias at no path point)
CNFG: IC1.3 R11.2 | length 5.3
  Top Layer w0.203: IC1.3 -16.927,1.674 -16.442,1.674 -16.106,1.338 -16.106,-0.076 R11.2 -14.163,-1.824
COMP: IC1.5 R6.2 | length 3.5
  Top Layer w0.203: IC1.5 -16.166,2.691 -14.504,1.029 R6.2 -14.189,1.054
EN_: IC1.19 RUV1.1 RUV2.2 TP6.1 | length 19.1
  Top Layer w0.203: v1(-21.59,3.683) -21.529,3.683 -21.034,3.188 -20.454,3.188 IC1.19 ; RUV2.2 TP6.1 ; RUV1.1 -10.922,8.764 -11.077,8.609 TP6.1 ; v1(-9.779,7.747) -9.785,7.753 -11.071,7.753 TP6.1
  Layer 2 w0.254: v1(-21.59,3.683) -19.459,5.814 -12.855,5.814 -12.065,6.604 -10.922,6.604 v1(-9.779,7.747)
FB: IC1.6 R2.2 | length 3.1
  Top Layer w0.203: IC1.6 -15.183,3.192 -14.544,2.553 R2.2
GND: C1.2 C2.1 C3.2 C4.2 C5.2 C6.2 C7.2 C8.1 C9.1 C10.1 C11.1 C12.1 C13.2 C14.1 C16.2 C17.1 C18.1 C19.2 C20.2 C21.1 C22.2 C23.2 C24.2 C29.1 C30.1 C32.1 C33.2 C34.2 C35.2 C36.2 C37.1 CN1.1 CN1.2 CN2.3 CN2.4 CSN.1 IC1.1 IC1.2 IC1.7 IC1.10 IC1.18 IC1.22 IC1.23 IC1.24 IC1.25 Q3.S Q4.S R11.1 R12.1 R_RP.1 RUV2.1 TVS1.2 | length 4.3
  Top Layer w0.203: IC1.18@-20.467,3.709 IC1.18 -19.701,3.692 -19.497,3.895 v2(-19.497,4.122) ; v2(-18.697,5.242) -18.648,5.192 IC1.10 ; v2(-17.897,4.122) -17.897,3.895 -17.694,3.692 IC1.7
  other v1: -21.082,-2.159 -19.685,-2.159 -18.034,-2.159 -16.383,-2.159 -59.812,-1.757 -58.923,-1.757 -84.107,-1.151 -82.329,-1.151 -80.551,-1.151 -78.773,-1.151 -76.995,-1.151 -57.437,-1.151 -48.547,-1.151 -46.769,-1.151 -44.991,-1.151 -27.211,-1.151 -11.209,-1.151 -9.431,-1.151 -58.034,0.021 -83.218,0.627 -79.662,0.627 -77.884,0.627 -56.548,0.627 -54.77,0.627 -52.992,0.627 -51.214,0.627 -49.436,0.627 -47.658,0.627 -44.102,0.627 -42.324,0.627 -40.546,0.627 -38.768,0.627 -36.99,0.627 -35.212,0.627 -33.434,0.627 -31.656,0.627 -29.878,0.627 -28.1,0.627 -8.542,0.627 -6.764,0.627 -4.986,0.627 -3.208,0.627 -58.034,0.91 -84.107,2.405 -76.995,2.405 -11.209,2.405 -9.431,2.405 -7.653,2.405 -5.875,2.405 -4.097,2.405 -2.319,2.405 1.397,3.302 -42.672,3.683 -41.783,3.683 -40.894,3.683 -40.005,3.683 -37.338,3.683 -36.449,3.683 -35.433,3.683 -34.544,3.683 -33.655,3.683 -32.766,3.683 -31.877,3.683 -30.988,3.683 -39.164,3.712 -38.275,3.712 -58.034,3.831 -88.552,4.183 -86.774,4.183 -84.996,4.183 -83.218,4.183 -77.884,4.183 -56.548,4.183 -54.77,4.183 -49.436,4.183 -47.658,4.183 -8.542,4.183 -58.034,4.72 -42.672,4.826 -41.783,4.826 -40.894,4.826 -40.005,4.826 -39.116,4.826 -38.227,4.826 -37.338,4.826 -35.433,4.826 -34.544,4.826 -33.655,4.826 -32.766,4.826 -31.908,4.815 -31.019,4.815 -11.176,4.953 -25.781,5.715 -89.441,5.961 -87.663,5.961 -85.885,5.961 -84.107,5.961 -82.329,5.961 -80.551,5.961 -78.773,5.961 -76.995,5.961 -57.437,5.961 -55.659,5.961 -53.881,5.961 -50.325,5.961 -48.547,5.961 -37.879,5.961 -9.431,5.961 -4.097,5.961 -59.177,6.498 -58.288,6.498 -14.859,6.985 1.524,7.62 -52.992,7.739 -51.214,7.739 -49.436,7.739 -47.658,7.739 -8.542,7.739 -52.103,9.517 -50.325,9.517 -48.547,9.517 -46.769,9.517 -44.991,9.517 -14.765,9.517 -12.987,9.517 -9.431,9.517 -52.992,11.295 -51.214,11.295 -52.103,13.073 -18.321,13.073 -16.543,13.073 -14.765,13.073 -12.987,13.073 -11.209,13.073 -9.431,13.073 -52.992,14.851 -51.214,14.851 -17.432,14.851 -12.098,14.851 -10.32,14.851 -52.103,16.629 -18.321,16.629 -11.209,16.629 -9.431,16.629 -52.992,18.407 -17.432,18.407 -15.654,18.407 -13.876,18.407 -12.098,18.407 -10.32,18.407 -88.552,21.963 -86.774,21.963 -84.996,21.963 -83.218,21.963 -79.662,21.963 -77.884,21.963 -58.326,21.963 -56.548,21.963 -54.77,21.963 -52.992,21.963 -59.301,21.992 -59.301,22.881 -89.441,23.741 -87.663,23.741 -85.885,23.741 -84.107,23.741 -82.423,23.749 -80.645,23.749 -78.74,23.749 -76.995,23.741 -58.285,24.405 -58.285,25.294 -84.996,25.519 -2.921,26.416 -84.107,27.297 -82.329,27.297 -80.551,27.297 -78.773,27.297 -76.995,27.297 -41.402,27.559 -40.64,27.559 -39.878,27.559 -39.116,27.559 -38.354,27.559 -37.592,27.559 -36.83,27.559 -36.068,27.559 -35.306,27.559 -34.544,27.559 -33.782,27.559 -33.02,27.686 -58.285,27.961 -58.285,28.85 -56.896,28.956 -83.218,29.075 -79.662,29.075 -77.884,29.075 -3.208,29.075 -41.783,29.718 -40.767,29.718 -39.497,29.718 -38.481,29.718 -36.703,29.718 -35.687,29.718 -49.251,29.82 -44.374,29.82 -54.077,29.845 -46.812,29.845 -33.782,29.845 -32.766,29.845 -51.664,29.87 -56.896,29.972 -29.972,29.972 -27.432,30.226 -13.843,30.353 -56.134,30.48 -2.413,30.48 -54.102,30.607 -51.689,30.607 -49.276,30.607 -46.863,30.607 -41.783,30.607 -40.767,30.607 -39.497,30.607 -38.481,30.607 -36.703,30.607 -35.687,30.607 -24.384,30.607 -10.668,30.607 -9.652,30.607 -44.577,30.734 -33.782,30.734 -32.766,30.734 -22.479,30.734 -19.05,30.734 -15.494,30.734
  other v2: -18.697,1.642 -19.497,2.762 -18.697,2.762 -17.897,2.762 -18.697,4.122
HO: IC1.13 RQ1.1 RQ2.1 TP4.1 | length 16.5
  Top Layer w0.381: -28.193,15.287 RQ2.1 RQ1.1 -28.222,11.331 -27.432,10.541 -21.082,10.541 -19.447,8.906 IC1.13
ISNS+: C31.2 IC1.20 R8.1 | length 3.7
  Top Layer w0.203: R8.1 -23.54,2.669 -22.75,2.669 -22.678,2.741 -22.418,2.741 C31.2 -22.039,2.691 IC1.20
ISNS-: C31.1 IC1.21 R10.1 | length 3.7
  Top Layer w0.203: R10.1 -23.498,2.225 -22.764,2.225 -22.648,2.109 -22.417,2.109 C31.1 -22.008,2.191 IC1.21
LO: IC1.11 RQ3.1 RQ4.1 TP9.1 | length 16.1
  Top Layer w0.203: IC1.11 -16.94,5.697 -16.442,5.697 -16.235,5.904 -16.235,6.412 v1(-16.157,6.49)
  Top Layer w0.381: RQ4.1 -28.251,7.426 RQ3.1 -28.321,7.357 TP9.1 -28.238,6.14 -27.349,6.14 v1(-27.305,6.096)
  Layer 2 w0.381: v1(-27.305,6.096) -27.051,6.096 -26.657,6.49 v1(-16.157,6.49)
NetC9_2: C9.2 L1.1 Q_RP.S TP1.1 ZD_RP.3 | length 9.6
  Top Layer w0.381: L1.1 L1.1@-15.547,26.269 ; C9.2 -12.307,27.305 v1(-10.795,27.305) ; ZD_RP.3 v1(-5.08,29.738)
  Bottom Layer w0.381: v1(-10.795,27.305) -10.795,27.94 -8.997,29.738 v1(-5.08,29.738)
NetC15_2: C15.2 IC1.15 SD1.2 | length 5.8
  Top Layer w0.203: -21.161,6.261 -21.161,5.418 -20.953,5.21 -20.467,5.21 IC1.15
  Top Layer w0.381: SD1.2@-23.539,8.55 SD1.2 -22.037,8.395 -22.037,7.137 -21.161,6.261
NetC30_2: C30.2 R6.1 | length 1.5
  Top Layer w0.203: R6.1 C30.2 -11.077,0.991
NetCN1_3: CN1.3 CN1.4 Q_RP.D TVS1.1
  other v1: -6.51,14.47 -1.811,14.47 -0.668,19.423 0.856,19.423 0.094,19.804 1.618,19.804 -1.43,19.931 -0.668,20.312 0.856,20.312 -6.764,20.693 -5.494,20.693 -4.351,20.693 1.618,20.693 0.111,20.767 -1.43,20.82 -0.668,21.201 0.856,21.201 0.094,21.582 1.618,21.582 -1.43,21.709 -0.668,22.09 0.856,22.09 -6.764,22.217 -5.494,22.217 -4.351,22.217 0.094,22.471 1.618,22.471 -1.43,22.598 -0.668,22.979 0.856,22.979 1.618,23.36 -6.764,23.487 -5.494,23.487 -4.351,23.487 -1.43,23.487 0.094,23.487
NetCSN_2: CSN.2 RSN.1 | length 2
  Top Layer w0.381: CSN.2 RSN.1
NetIC1_17: IC1.17 R9.1 | length 11.8
  Top Layer w0.203: R9.1 -26.302,-0.114 -26.797,0.381 -26.797,3.302 -26.289,3.81 -22.557,3.81 -22.005,4.362 -21.173,4.362 -21.021,4.209 -20.467,4.209 IC1.17
NetQ1_G: Q1.G RQ1.2 | length 3.2
  Top Layer w0.381: Q1.G -31.697,15.672 -31.293,15.672 -29.845,14.224 RQ1.2
NetQ2_G: Q2.G RQ2.2 | length 11.3
  Top Layer w0.381: Q2.G -38.747,15.828 -38.747,16.646 -38.477,16.915 -30.781,16.915 RQ2.2
NetQ3_G: Q3.G RQ3.2 | length 3
  Top Layer w0.381: Q3.G -30.268,6.37 RQ3.2
NetQ4_G: Q4.G RQ4.2 | length 11.3
  Top Layer w0.381: Q4.G -38.938,6.366 -38.938,7.391 -38.71,7.62 -30.81,7.62 -29.914,8.516 RQ4.2
NetQ_RP_G: Q_RP.G R_RP.2 ZD_RP.1 | length 13.8
  Top Layer w0.381: v1(-10.143,20.058) Q_RP.G ; -8.344,29.957 R_RP.2 -7.696,28.943 v1(-7.696,26.788) -7.684,26.801 -6.042,26.801 ZD_RP.1
  Bottom Layer w0.381: v1(-10.143,20.058) -10.143,24.325 -7.696,26.772 v1(-7.696,26.788)
R_SENSE_N: C17.2 C18.2 C19.1 C20.1 C21.2 C22.1 C23.1 C24.1 CN2.1 CN2.2 R4.2 R10.2 TP7.1 | length 55.8
  Top Layer w0.203: R4.2 -70.181,14.47 -69.935,14.224 v1(-69.825,14.224) ; v1(-25.682,2.069) -24.917,2.069 R10.2
  Layer 2 w0.203: v1(-69.825,14.224) -69.825,14.114 -69.685,13.974 -69.685,8.84 -63.053,2.209 -25.931,2.209 -25.792,2.069 v1(-25.682,2.069)
  other v1: -81.407,11.049 -79.883,11.049 -78.359,11.049 -76.835,11.049 -75.311,11.049 -80.772,12.065 -79.248,12.065 -77.724,12.065 -76.2,12.065 -74.676,12.065 -81.407,13.081 -79.883,13.081 -78.359,13.081 -76.835,13.081 -75.311,13.081 -80.645,16.002 -79.121,16.002 -77.597,16.002 -76.073,16.002 -74.549,16.002 -81.407,16.891 -79.883,16.891 -78.359,16.891 -76.835,16.891 -75.311,16.891 -80.645,17.78 -79.121,17.78 -77.597,17.78 -76.073,17.78 -74.549,17.78
R_SENSE_P: L2.2 R4.1 R8.2 TP11.1 | length 55
  Top Layer w0.203: v1(-69.088,14.224) -68.978,14.224 -68.732,14.47 R4.1 ; v1(-25.682,2.807) -24.892,2.807 R8.2
  Layer 2 w0.203: v1(-69.088,14.224) -69.088,14.114 -69.228,13.974 -69.228,9.03 -62.864,2.666 -25.933,2.666 -25.792,2.807 v1(-25.682,2.807)
  other v1: -65.438,9.136 -63.66,9.136 -66.708,9.517 -65.438,10.152 -63.66,10.152 -66.708,10.66 -65.438,11.168 -63.66,11.168 -66.708,11.676 -65.438,12.184 -63.66,12.184 -64.803,13.2 -63.914,13.2 -63.025,13.2 -64.803,15.613 -63.914,15.613 -63.025,15.613 -65.438,16.883 -63.66,16.883 -66.708,17.518 -65.438,18.026 -63.66,18.026 -66.708,18.661 -65.438,19.042 -63.66,19.042 -66.708,19.677
RT: IC1.4 R12.2 | length 4.2
  Top Layer w0.203: IC1.4 -16.927,2.174 -16.295,2.174 -15.649,1.528 -15.649,0.991 R12.2
SW_NODE: C15.1 IC1.14 L2.1 Q1.S Q2.S Q3.D Q4.D RSN.2 TP10.1 | length 22.6
  Top Layer w0.381: RSN.2 -44.231,8.408 -42.382,8.408 Q4.D@-40.8,9.99 ; Q3.D@-33.536,10.19 -33.688,10.037 -33.1,9.449 -21.6,9.449 -21.006,8.856 -21.006,8.852 C15.1 -20.493,8.339 IC1.14@-20.493,5.764
VCC: C10.2 IC1.9 SD1.1 TP3.1 | length 35.8
  Top Layer w0.203: IC1.9 -16.927,4.71 -16.245,4.71 v1(-15.875,5.08)
  Top Layer w0.254: v1(-15.875,5.08) -15.383,5.572 TP3.1@-15.036,5.572 ; TP3.1@-14.94,5.715 TP3.1@-14.797,5.858
  Top Layer w0.381: SD1.1 -26.797,8.382 v1(-25.781,8.382) ; TP3.1@-14.893,5.715 -14.881,5.728 C10.2
  Layer 2 w0.381: v1(-25.781,8.382) -27.559,8.382 -28.575,7.366 -28.575,5.207 -28.067,4.699 -25.146,4.699 -24.511,4.064 -24.511,0 -23.368,-1.143 -15.494,-1.143 -14.605,-0.254 -14.605,4.572 -15.069,5.036 -15.831,5.036 v1(-15.875,5.08)
VCCX: C32.2 C33.1 IC1.16 TP16.1 | length 4.6
  Top Layer w0.203: -21.526,4.898 -21.319,4.692 IC1.16
  Top Layer w0.381: C33.1 C32.2 ; -23.193,4.966 -22.787,5.372 -22.406,5.372 TP16.1@-22.253,5.22 ; TP16.1 -21.526,4.898
VDDA: C29.2 IC1.8 R2.1 R9.2 TP13.1 TP17.1 | length 16.8
  Top Layer w0.203: R9.2 -23.35,-0.122 TP17.1 -22.03,-0.125 -20.83,-0.125 v1(-20.828,-0.127) ; IC1.8 -16.927,4.174 -16.011,4.174 v1@-16.007,4.17
  Top Layer w0.254: v1(-15.992,4.15) -15.966,4.177 -14.914,4.177 TP13.1
  Top Layer w0.381: TP13.1 C29.2 -13.655,3.943 -12.525,2.813 R2.1
  Layer 2 w0.254: v1(-20.828,-0.127) -16.51,-0.127 -15.992,0.391 v1(-15.992,4.15)
VIN: C1.1 C2.2 C3.1 C4.1 C5.1 C6.1 C7.1 C8.2 C11.2 C12.2 C13.1 C14.2 C16.1 C34.1 C35.1 C36.1 C37.2 IC1.12 L1.2 Q1.D Q2.D RUV1.2 TP2.1 | length 14.8
  Top Layer w0.381: C1.1 -23.58,15.96 -18.618,10.998 RUV1.2
  other v1: -42.666,17.862 -40.761,17.862 -38.858,17.919 -35.554,17.919 -33.649,17.919 -31.737,17.919 -37.211,18.161 -45.212,18.288 -37.211,19.05 -45.212,19.177 -42.666,19.386 -40.761,19.386 -38.856,19.386 -35.554,19.386 -33.649,19.386 -31.744,19.386 -37.211,19.939 -45.212,20.32 -28.349,20.587 -26.825,20.587 -40.761,20.783 -33.649,20.783 -37.211,20.828 -42.666,20.91 -38.856,20.91 -35.554,20.91 -31.744,20.91 -27.587,20.968 -29.111,21.095 -26.063,21.095 -45.212,21.209 -28.349,21.476 -26.825,21.476 -37.211,21.844 -27.587,21.857 -29.111,21.984 -26.063,21.984 -28.349,22.365 -26.825,22.365 -37.211,22.733 -27.587,22.746 -29.111,22.873 -26.063,22.873 -28.349,23.254 -26.825,23.254 -46.134,23.614 -45.245,23.614 -43.34,23.614 -42.451,23.614 -40.546,23.614 -39.657,23.614 -37.752,23.614 -36.863,23.614 -34.958,23.614 -34.069,23.614 -32.291,23.614 -31.402,23.614 -27.587,23.635 -29.111,23.762 -26.063,23.762 -55.626,24.003 -54.737,24.003 -53.848,24.003 -52.959,24.003 -51.943,24.003 -50.927,24.003 -49.911,24.003 -48.895,24.003 -47.879,24.003 -28.349,24.143 -26.825,24.143 -27.587,24.524 -29.111,24.651 -26.063,24.651 -46.101,24.765 -45.212,24.765 -43.307,24.765 -42.418,24.765 -55.626,24.892 -54.737,24.892 -53.848,24.892 -52.959,24.892 -51.943,24.892 -50.927,24.892 -49.911,24.892 -48.895,24.892 -47.879,24.892 -31.623,24.892 -30.734,24.892
pads on no net: MH1.1 MH2.1 MH3.1 MH4.1 Q1.1 Q2.1 Q3.1 Q4.1 ZD_RP.2

## Polygon pours and split planes (outlines as drawn)
GND on Top Layer "GND_L01_P049" (solid, remove dead copper, pour order 49): -91.535,31.496 3.556,31.496 3.556,-3.556 -91.535,-3.556
NetC9_2 on Top Layer "NETC9_2_L01_P047" (solid, pour order 47): -8.382,20.828 -8.128,21.082 -8.128,27.813 -9.03,28.715 -13.497,28.715 -13.497,28.737 -14.478,29.718 -18.542,29.718 -18.923,29.337 -18.923,21.082 -18.669,20.828
R_SENSE_P on Top Layer "R_SENSE_P_L01_P044" (solid, pour order 44): -69.116,18.994 -67.298,21.072 -54.926,21.072 -54.418,20.564 -54.418,8.372 -54.926,7.864 -67.011,7.864 -69.116,10.496
VIN on Top Layer "VIN_L01_P048" (solid, pour order 48): -19.558,29.718 -19.177,29.337 -19.177,12.446 -18.669,11.938 -16.538,9.807 -16.538,6.957 -17.78,5.715 -18.161,5.715 -18.415,5.969 -18.415,9.779 -22.479,13.843 -25.527,13.843 -29.337,17.653 -48.895,17.653 -49.53,18.288 -49.53,22.225 -50.8,23.495 -56.134,23.495 -56.769,24.13 -56.769,27.103 -56.173,27.699 -56.161,27.686 -42.672,27.686 -42.164,27.178 -42.164,25.781 -41.91,25.527 -32.639,25.527 -32.385,25.781 -32.385,27.178 -31.758,27.805 -27.694,27.805 -26.416,29.083 -24.384,29.083 -23.749,29.718
NetCN1_3 on Top Layer "NETCN1_3_L01_P046" (solid, pour order 46): 0,4.191 0.381,4.572 0.381,8.382 0.889,8.89 -3.175,8.89 -2.54,8.255 -2.54,4.572 -2.159,4.191
SW_NODE on Top Layer "SW_NODE_L01_P045" (solid, pour order 45): -50.066,17.285 -43.97,17.285 -43.208,16.523 -39.906,16.523 -39.652,16.269 -39.652,14.745 -39.398,14.491 -38.382,14.491 -38.128,14.745 -38.128,16.015 -37.62,16.523 -35.842,16.523 -32.794,16.523 -32.54,16.269 -32.54,14.745 -32.286,14.491 -31.778,14.491 -31.27,13.983 -31.27,8.395 -31.524,8.141 -42.954,8.141 -43.208,8.395 -43.208,10.935 -43.97,11.697 -50.066,11.697
R_SENSE_N on Top Layer "R_SENSE_N_L01_P043" (solid, pour order 43): -91.512,19.437 -78.958,19.437 -75.91,22.485 -75.91,30.588 -74.988,31.51 -62.288,31.51 -61.432,30.654 -61.432,21.977 -62.059,21.35 -67.37,21.35 -69.552,19.027 -69.487,10.158 -67.338,7.506 -62.201,7.506 -61.432,6.737 -61.432,-2.051 -62.288,-2.907 -75.115,-2.907 -75.91,-2.112 -75.91,6.483 -78.958,9.531 -91.512,9.531
NetCN1_3 on Top Layer "NETCN1_3_L01_P040" (solid, pour order 40): -7.653,24.566 -7.209,25.011 1.989,25.011 3.258,23.742 3.258,9.71 2.303,8.755 -7.272,8.755 -7.653,9.136
GND on Layer 2 "GND_L03_P053" (solid, remove dead copper, pour order 53): -88.806,-3.431 cw(c-88.806,-0.725) -91.512,-0.725 -91.535,28.643 cw(c-88.672,28.643) -88.672,31.506 -88.672,31.507 0.322,31.513 cw(c0.322,28.465) 3.37,28.465 3.431,-0.5 cw(c0.5,-0.5) 0.5,-3.431
NetCN1_3 on Layer 2 "NETCN1_3_L03_P052" (solid, pour order 52): -7.78,24.566 -7.526,24.82 2.634,24.82 3.131,24.323 3.131,8.935 2.761,8.564 -7.399,8.564 -7.78,8.945
GND on Bottom Layer "GND_L04_P055" (solid, remove dead copper, pour order 55): -91.44,31.496 3.556,31.496 3.556,-3.556 -91.535,-3.556 -91.44,-3.461
R_SENSE_P on Bottom Layer "R_SENSE_P_L04_P042" (solid, pour order 42): -69.096,18.713 -67.033,21.072 -55.126,21.072 -54.618,20.564 -54.618,8.372 -55.126,7.864 -66.81,7.864 -69.096,10.722
VIN on Bottom Layer "VIN_L04_P051" (solid, pour order 51): -57.023,27.178 -56.515,27.686 -42.672,27.686 -42.164,27.178 -42.164,25.781 -41.91,25.527 -32.893,25.527 -32.385,26.035 -32.385,27.178 -31.758,27.805 -27.44,27.805 -26.416,28.829 -21.59,28.829 -20.828,28.067 -20.828,17.907 -21.844,16.891 -50.673,16.891 -51.562,17.78 -51.562,22.733 -52.324,23.495 -56.261,23.495 -57.023,24.257
R_SENSE_N on Bottom Layer "R_SENSE_N_L04_P050" (solid, pour order 50): -73.66,21.082 -90.678,21.082 -91.313,20.447 -91.313,8.636 -90.551,7.874 -73.66,7.874 -72.771,8.763 -72.771,20.193
NetCN1_3 on Bottom Layer "NETCN1_3_L04_P041" (solid, pour order 41): -7.653,24.566 -6.82,25.4 2.54,25.4 3.258,24.682 3.258,9.862 1.96,8.564 -6.532,8.564 -7.653,9.685
GND on Layer 1 "GND_L02_P054" (solid, remove dead copper, pour order 54): 3.556,31.496 3.556,-3.556 -91.535,-3.556 -91.44,-3.461 -91.44,31.496

## Keep-outs
Keep-Out Layer:
  lines w0.2: -91.535,28.643 -91.512,-0.725 ; -88.806,-3.431 0.5,-3.431 ; -88.672,31.507 0.322,31.513 ; 3.37,28.465 3.431,-0.5
  lines w0.203: -91.535,28.643 cw(c-88.672,28.643) -88.672,31.506 ; -91.512,-0.725 ccw(c-88.806,-0.725) -88.806,-3.431 ; 0.322,31.513 cw(c0.322,28.465) 3.37,28.465 ; 0.5,-3.431 ccw(c0.5,-0.5) 3.431,-0.5

## Other copper
Top Layer:
  pour cut-out: -13.589,3.048 -13.081,3.048 -13.081,0.508 -13.589,0.508
  pour cut-out: -26.543,3.81 -22.178,3.81 -20.939,2.571 -20.939,-0.686 -26.238,-0.686 -26.543,-0.381
  pour cut-out: -31.031,14.082 -30.559,14.554 -27.28,14.554 -22.49,9.765 -22.49,7.137 -30.785,7.137 -31.031,7.384

## Silkscreen, mask and mechanical layers (free items; w line width, h text height)
Top Overlay:
  drawing of 27 lines, arcs and shapes, not listed
  text "+ OUT +" at -90.622,20.015 h2.54
  text "+ IN +" at 2.812,18.836 h2.54 r90
  text "- OUT -" at -90.107,6.807 h2.54
  text "- IN -" at 2.812,3.348 h2.54 r90
  text "2" at -7.094,-1.18 h3
  text "NS Power" at -43.687,-2.49 h3.81
  text "E" at -5.322,-2.534 h3
  text "A" at -14.687,-2.909 h3
Bottom Overlay:
  text "120W 12V-10A Power supply / Revision V1.2 / Designed in Serbia / Manufactured by: JLCPCB" at -19.558,5.99 h1.78

## Text inside footprints (layer, text, board x,y; h text height)
IC1: Mechanical 13 "*" at -17.63,1.689 h1.27 r180